# Altium PCB DAM10.PcbDoc
Units mm, origin at the board's own origin, x right, y up, seen from the top; angles counter-clockwise.
Board outline 153 x 82.02 mm, 4 copper layers (Top Layer, MidLayer1, MidLayer2, Bottom Layer), stack 0.778 mm thick; 96 components, 70 nets, 353 pads, 42 vias.
Unrouted connection lines stored in the file: 116.
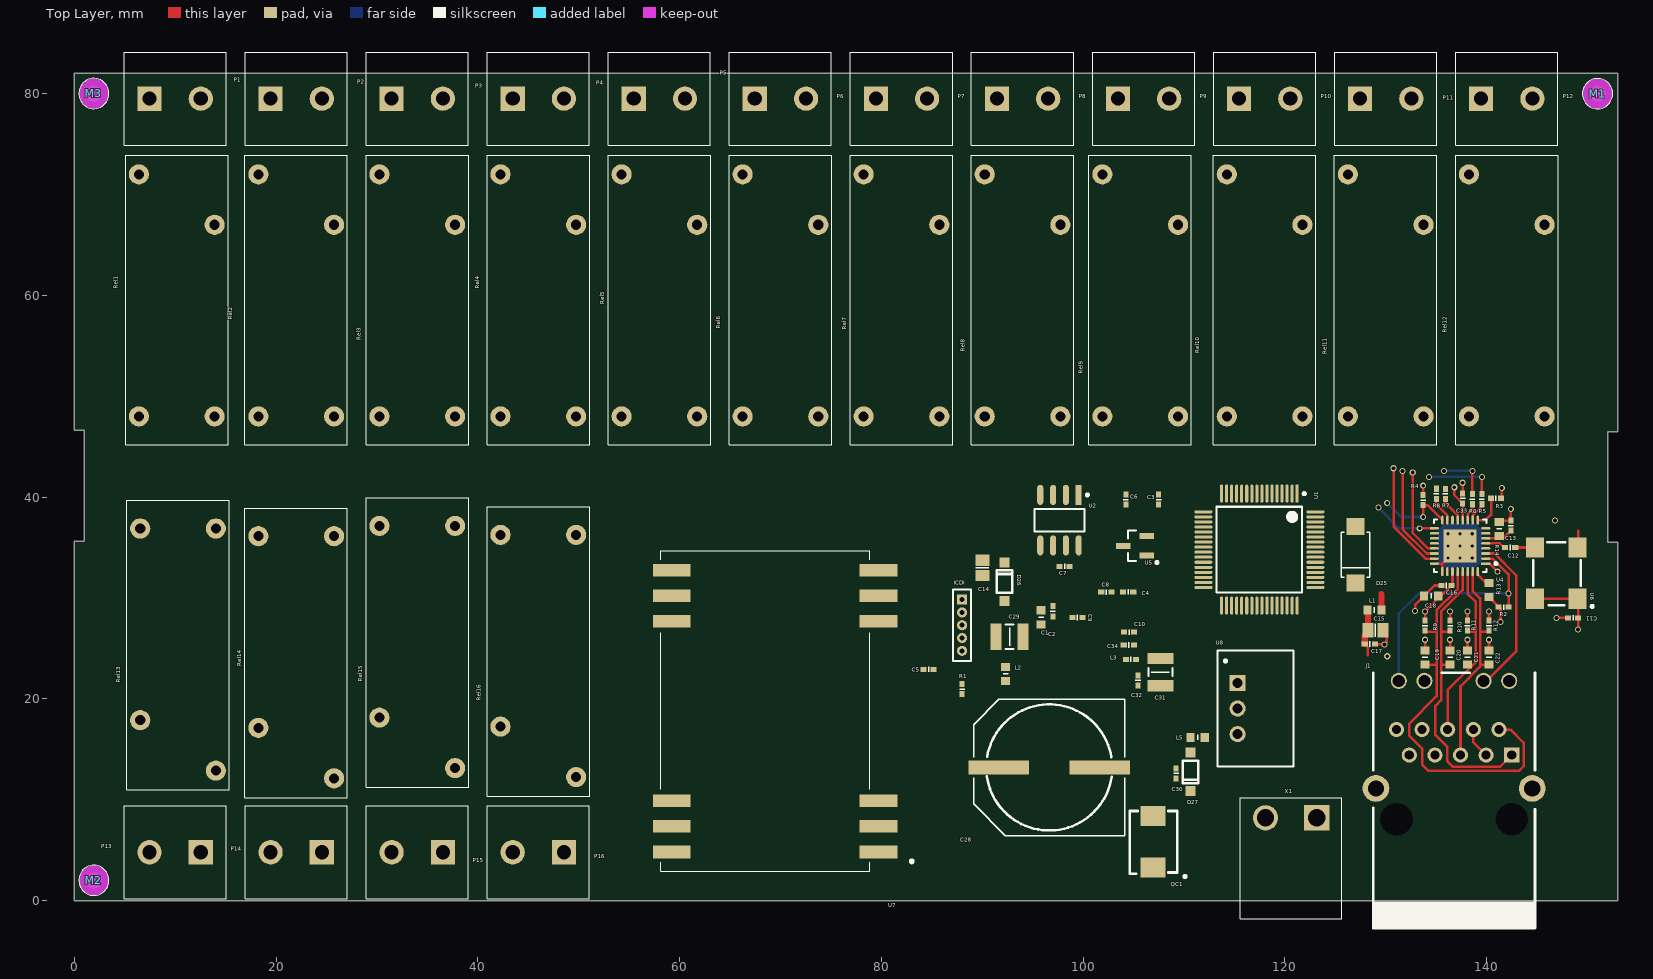
[diagram p0: Top Layer view]
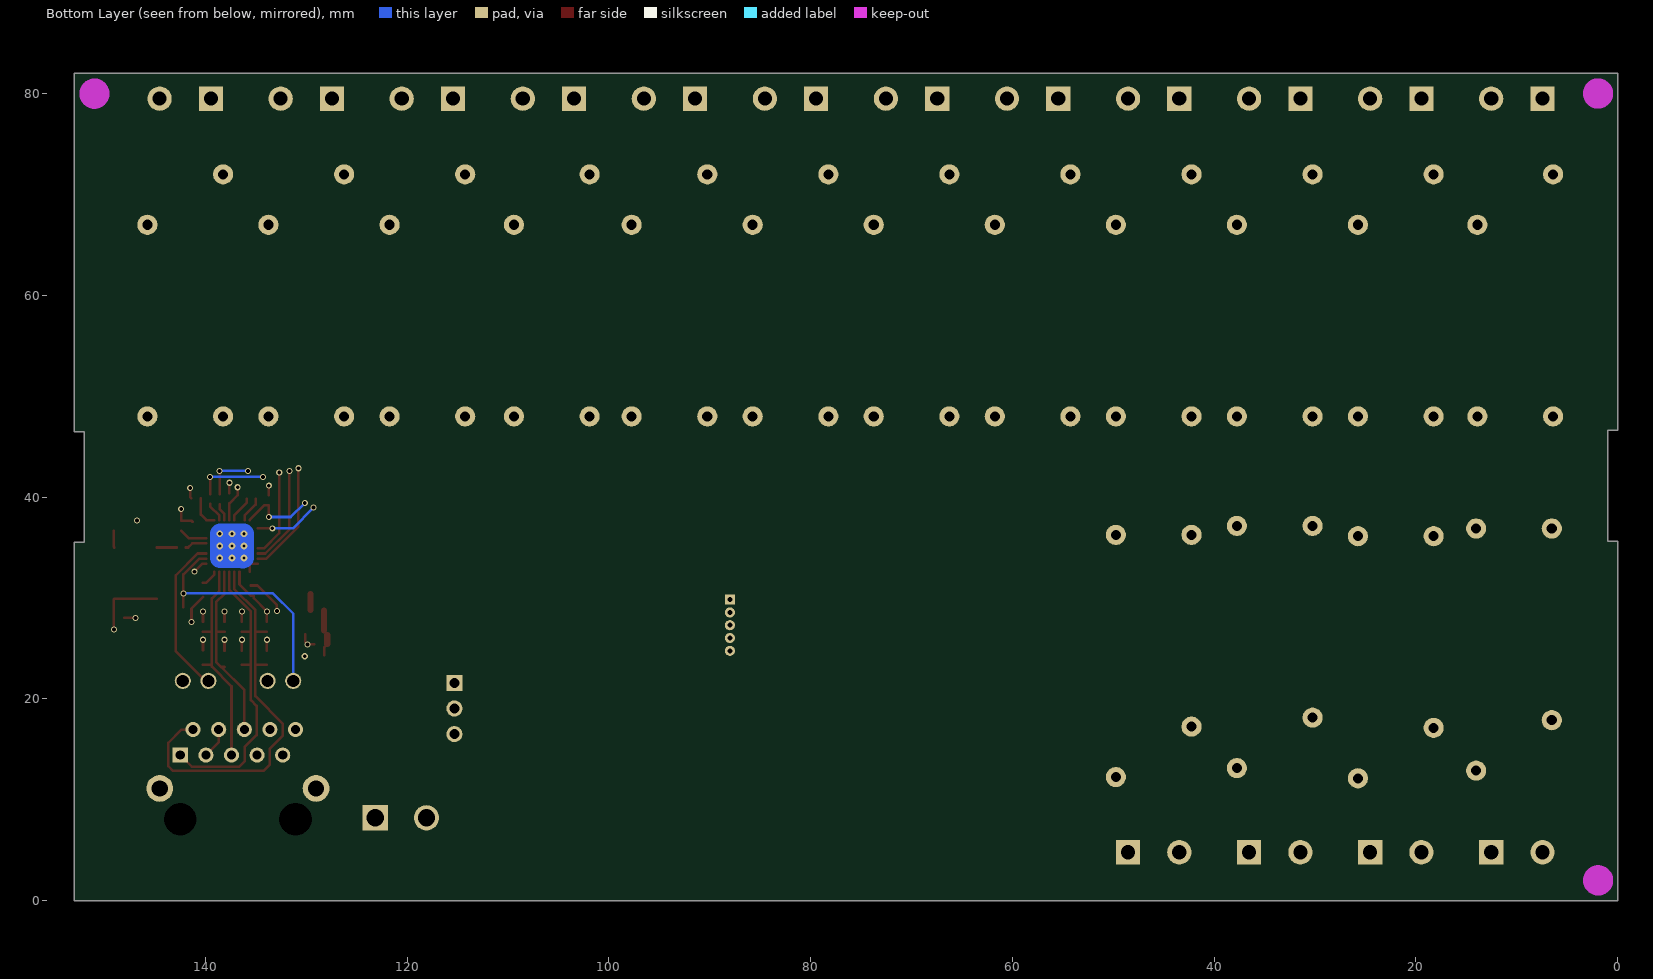
[diagram p1: Bottom Layer view, seen from below]

## Layer stack, top to bottom
Top Solder: solder mask 0.0102, Solder Resist, Dk 3.5
Top Layer: signal copper 0.0356
Dielectric 1: core 0.254, FR-4, Dk 4.2
MidLayer1: signal copper 0.036
Dielectric 3: prepreg 0.127, Dk 4.2
MidLayer2: signal copper 0.036
Dielectric 2: core 0.254, Dk 4.2
Bottom Layer: signal copper 0.0356
Bottom Solder: solder mask 0.0102, Solder Resist, Dk 3.5

## Board outline
0,0 0,35.65 1,35.65 1,46.648 0,46.648 0,82.017 153,82.017 153,46.507 152,46.507 152,35.509 153,35.509 153,0

## Design rules (kind name [scope] priority, off if disabled: settings)
Clearance [All] p1: gap=0.12
HoleSize [All] p1: absolutevalues=TRUE maxlimit=4 minlimit=0.025 maxpercent=80.000 minpercent=20.000
PolygonConnect [All] p1: connectstyle=Relief reliefconductorwidth=0.254 reliefentries=4 polygonreliefangle="90 Angle" airgapwidth=0.254
RoomDefinition DAM10_Relays [InComponentClass('DAM10_Relays')] p1: confinementstyle=ConfineIn formatcopy=TRUE lockcomponents=FALSE outline -10.16,-0.964 177.673,-0.964 177.673,84.328 -10.16,84.328
RoomDefinition DAM10_Ethernet [InComponentClass('DAM10_Ethernet')] p2: confinementstyle=ConfineIn formatcopy=TRUE lockcomponents=FALSE outline -6.985,-16.169 173.99,-16.169 173.99,87.122 -6.985,87.122
RoomDefinition DAM10_Control [InComponentClass('DAM10_Control')] p3: confinementstyle=ConfineIn formatcopy=TRUE lockcomponents=FALSE outline -4.572,-12.74 160.274,-12.74 160.274,91.821 -4.572,91.821
RoutingVias [All] p1: holewidth=0.711 width=1.27 viastyle="Through Hole" minholewidth=0.3 minwidth=0.5 maxholewidth=0.711 maxwidth=1.27
SilkToBoardRegionClearance [HasFootprint('7499210124A')] p1:
SolderMaskExpansion [All] p1: expansion=0.102
UnpouredPolygon [All] p1: allowunpoured=FALSE
Width [All] p1: maxlimit=4 minlimit=0.254 preferedwidth=0.254
27 further rules are at their usual default settings.

## Classes and differential pairs
component class DAM10_Relays: P1 P2 P3 P4 P5 P6 P7 P8 P9 P10 P11 P12 P13 P14 P15 P16 Rel1 Rel2 Rel3 Rel4 Rel5 Rel6 Rel7 Rel8 Rel9 Rel10 Rel11 Rel12 Rel13 Rel14 Rel15 Rel16
component class DAM10_Control: C1 C2 C3 C4 C5 C6 C7 C8 C9 C10 C28 C29 C30 C31 C32 C34 D25 D26 D27 ICDI L2 L3 L5 M1 M2 M3 QC1 R1 U1 U2 U5 U7 U8 X1
component class DAM10_Ethernet: C11 C12 C13 C14 C15 C16 C17 C18 C19 C20 C21 C22 C33 J1 L1 R2 R3 R4 R5 R6 R7 R8 R9 R10 R11 R12 R13 R14 U4 U6

## Components (designator, comment, footprint, x,y, rotation, side; value= is the part's Value field where it differs from the comment)
C1 "10uF10V_0603" C0603 95.838,28.089 r270 top
C2 "100nF16V_0402" C0402 96.998,28.689 r270 top
C3 "100nF16V_0402" C0402 107.488,39.751 r90 top
C4 "100nF16V_0402" C0402 104.475,30.607 r180 top
C5 "100nF16V_0402" C0402 84.683,22.931 r0 top
C6 "100nF16V_0402" C0402 104.249,39.751 r90 top
C7 "22pF50V_0402" C0402 98.171,33.147 r180 top
C8 "22pF50V_0402" C0402 102.305,30.577 r180 top
C9 "100nF16V_0402" C0402 99.441,28.067 r180 top
C10 "100nF16V_0402" C0402 104.555,26.616 r180 top
C11 "100nF16V_0402" C0402 148.567,28.027 r180 top
C12 "1uF50V_0603" C0603 141.26,36.854 r90 top
C13 "470pF50V_0402" C0402 142.4,37.184 r90 top
C14 "4u7F25V_0805" C0805 90.02,32.994 r270 top
C15 "4u7F25V_0805" C0805 128.982,26.803 r0 top
C16 "100nF25V_0402" C0402 136.02,31.244 r180 top
C17 "100nF25V_0402" C0402 128.422,25.447 r0 top
C18 "22nF50V_0603" C0603 134.51,30.214 r180 top
C19 "10pF50V_0603" C0603 133.89,24.114 r90 top
C20 "10pF50V_0603" C0603 136.383,24.114 r90 top
C21 "10pF50V_0603" C0603 138.11,24.114 r90 top
C22 "10pF50V_0603" C0603 140.24,24.114 r90 top
C28 "470uF25V_POL" Panasonic-H13 96.647,13.208 r180 top
C29 "10uF50V_1210" C1210 92.71,26.162 r0 top
C30 "100nF25V_0402" C0402 109.232,12.607 r90 top
C31 "10uF25V_1210" C1210 107.665,22.656 r90 top
C32 "100nF25V_0402" C0402 105.445,21.826 r270 top
C33 "100nF25V_0402" C0402 137.627,39.877 r90 top
C34 "100nF25V_0402" C0402 104.535,25.346 r0 top
D25 "SMAJ58A-E3/61" DO214A 127,34.29 r270 top
D26 "RB160M-30TR" SOD123 92.202,31.623 r90 top
D27 "SD103AW-V-GS08" SOD123 110.642,12.767 r270 top
ICDI "ICDI" HDR1X5-1.27 88.011,27.305 r270 top
J1 "7499210124A" 7499210124A 136.78,8.074 r180 top
L1 "120R4A_0603" L0603 128.88,28.809 r0 top
L2 "300R2A_0603" L0603 92.329,22.479 r90 top
L3 "120R1.2A_0402" P0402 104.745,23.916 r180 top
L5 "10uF2A" L0603 111.362,16.187 r180 top
M1 "Mark" Mark-3mm 151,80 r0 top
M2 "Mark" Mark-3mm 1.942,2.014 r0 top
M3 "Mark" Mark-3mm 1.942,80.014 r90 top
P1 "PHOENIX_1715721" Phoenix-2-5_08 10,79.5 r0 top
P2 "PHOENIX_1715721" Phoenix-2-5_08 22,79.5 r0 top
P3 "PHOENIX_1715721" Phoenix-2-5_08 34,79.5 r0 top
P4 "PHOENIX_1715721" Phoenix-2-5_08 46,79.5 r0 top
P5 "PHOENIX_1715721" Phoenix-2-5_08 58,79.5 r0 top
P6 "PHOENIX_1715721" Phoenix-2-5_08 70,79.5 r0 top
P7 "PHOENIX_1715721" Phoenix-2-5_08 82,79.5 r0 top
P8 "PHOENIX_1715721" Phoenix-2-5_08 94,79.5 r0 top
P9 "PHOENIX_1715721" Phoenix-2-5_08 106,79.5 r0 top
P10 "PHOENIX_1715721" Phoenix-2-5_08 118,79.5 r0 top
P11 "PHOENIX_1715721" Phoenix-2-5_08 130,79.5 r0 top
P12 "PHOENIX_1715721" Phoenix-2-5_08 142,79.5 r0 top
P13 "PHOENIX_1715721" Phoenix-2-5_08 10,4.8 r180 top
P14 "PHOENIX_1715721" Phoenix-2-5_08 22,4.8 r180 top
P15 "PHOENIX_1715721" Phoenix-2-5_08 34,4.8 r180 top
P16 "PHOENIX_1715721" Phoenix-2-5_08 46,4.8 r180 top
QC1 "7A-8.000MAAJ-T" TXC_7A 106.934,5.842 r90 top
R1 "10k_0402" R0402 88.013,20.971 r270 top
R2 "10k_0402" R0402 141.69,29.104 r0 top
R3 "10k_0402" R0402 140.917,39.89 r0 top
R4 "1k5_0402" R0402 133.716,39.714 r90 top
R5 "10R_0402" R0402 139.532,39.796 r270 top
R6 "10R_0402" R0402 138.593,39.796 r90 top
R7 "10R_0402" R0402 135.91,40.314 r90 top
R8 "10R_0402" R0402 135.02,40.334 r90 top
R9 "49R9_0402" R0402 133.89,27.274 r90 top
R10 "49R9_0402" R0402 136.383,27.274 r90 top
R11 "49R9_0402" R0402 138.11,27.274 r90 top
R12 "49R9_0402" R0402 140.24,27.274 r90 top
R13 "12k1_0603" R0603(1608) 140.24,30.794 r90 top
R14 "33R_0402" R0402 142.344,35.012 r180 top
Rel1 "Finder-43_41-Rel" "Finder-43_41 series" 10.16,60 r90 top
Rel2 "Finder-43_41-Rel" "Finder-43_41 series" 22,60 r90 top
Rel3 "Finder-43_41-Rel" "Finder-43_41 series" 34,60 r90 top
Rel4 "Finder-43_41-Rel" "Finder-43_41 series" 46,60 r90 top
Rel5 "Finder-43_41-Rel" "Finder-43_41 series" 58,60 r90 top
Rel6 "Finder-43_41-Rel" "Finder-43_41 series" 70,60 r90 top
Rel7 "Finder-43_41-Rel" "Finder-43_41 series" 82,60 r90 top
Rel8 "Finder-43_41-Rel" "Finder-43_41 series" 94,60 r90 top
Rel9 "Finder-43_41-Rel" "Finder-43_41 series" 105.664,60 r90 top
Rel10 "Finder-43_41-Rel" "Finder-43_41 series" 118,60 r90 top
Rel11 "Finder-43_41-Rel" "Finder-43_41 series" 130,60 r90 top
Rel12 "Finder-43_41-Rel" "Finder-43_41 series" 142,60 r90 top
Rel13 "Finder-43_41-Rel" "Finder-43_41 series" 10.287,24.892 r270 top
Rel14 "Finder-43_41-Rel" "Finder-43_41 series" 22,24.13 r270 top
Rel15 "Finder-43_41-Rel" "Finder-43_41 series" 34,25.146 r270 top
Rel16 "Finder-43_41-Rel" "Finder-43_41 series" 46,24.257 r270 top
U1 "PIC32MX695F512H-80I/PT" TQFP-64_N1 117.475,34.798 r270 top
U2 "25LC1024-I_SM" SOP8_N 97.663,37.719 r270 top
U4 "LAN8741-EN" 32M1-A_M 137.371,35.164 r180 top
U5 "11AA02E48T-I_TT" SOT23_M 105.156,35.179 r180 top
U6 "TXC-7W-50.000MBB-T" TXC_7W 146.916,32.472 r90 top
U7 "AG-9700-2BR" Ag9700-2BR 69.469,18.796 r90 top
U8 "R-783.3-0.5" R-783_3-0_5 115.316,19.05 r270 top
X1 "WR-TBL3127" WR-TBL-3127 120.627,8.215 r180 top

## Footprints (in the part's own frame and the unit in brackets; to place one, negate y for a bottom-side part, rotate by r counter-clockwise, add the part's x,y. Pads: shape width x height; smd on the part's side, far side on the other; paste and mask are expansions set on the pad)
32M1-A_M [mm] "QFN, 32-Leads, Body 5x5mm, Pitch 0.5mm, IPC Low Density"
  rect 0.9x0.25 smd: 1(-2.55,1.75)
  oval 0.9x0.25 smd: 2(-2.55,1.25) 3(-2.55,0.75) 4(-2.55,0.25) 5(-2.55,-0.25) 6(-2.55,-0.75) 7(-2.55,-1.25) 8(-2.55,-1.75) 17(2.55,-1.75) 18(2.55,-1.25) 19(2.55,-0.75) 20(2.55,-0.25) 21(2.55,0.25) 22(2.55,0.75) 23(2.55,1.25) 24(2.55,1.75)
  oval 0.25x0.9 smd: 9(-1.75,-2.55) 10(-1.25,-2.55) 11(-0.75,-2.55) 12(-0.25,-2.55) 13(0.25,-2.55) 14(0.75,-2.55) 15(1.25,-2.55) 16(1.75,-2.55) 25(1.75,2.55) 26(1.25,2.55) 27(0.75,2.55) 28(0.25,2.55) 29(-0.25,2.55) 30(-0.75,2.55) 31(-1.25,2.55) 32(-1.75,2.55)
  rect 3.3x3.3 smd: 33(0,0)
  silkscreen extent -3.68,-2.6 2.6,2.6, body extent -2.58,-2.58 2.58,2.58, height 1
7499210124A [mm] "Connector; PCB Jack, Thru-Hole; RJ45,POE; Shielded with Lightpipes; Right Angle"
  rect 1.5x1.5 hole 0.9: 1(-5.715,-6.35)
  round 1.5 hole 0.9: 2(-4.445,-8.89) 3(-3.175,-6.35) 4(-1.905,-8.89) 5(-0.635,-6.35) 6(0.635,-8.89) 7(1.905,-6.35) 8(3.175,-8.89) 9(4.445,-6.35) 10(5.715,-8.89)
  round 1.6 hole 1.2: 11(-5.465,-13.72) 12(-2.925,-13.72) 13(2.946,-13.72) 14(5.486,-13.72)
  round 2.65 hole 1.6: MH1(-7.745,-3.05) MH2(7.745,-3.05)
  round 2.95 hole 3.25 unplated: MH3(-5.715,0) MH4(5.715,0)
  silkscreen extent -8.02,-14.5 8.02,10.8, body extent -8.27,-14.51 8.13,10.79, height 13.81
Ag9700-2BR [mm] "Silvertel, Ag9700-Small"
  rect 1.25x3.75 smd: 1(-13.97,-10.25) 2(-11.43,-10.25) 3(-8.89,-10.25) 4(8.89,-10.25) 5(11.43,-10.25) 6(13.97,-10.25) 7(13.97,10.25) 8(11.43,10.25) 9(8.89,10.25) 10(-8.89,10.25) 11(-11.43,10.25) 12(-13.97,10.25)
  silkscreen extent -15.9,-13.69 15.9,11.35, body extent -15.9,-9.4 15.9,11.35, height 18
C0402 [mm] "Chip Capacitor, Body 1.0x0.5mm, IPC High Density"
  rect 0.6x0.5 smd: 1(-0.5,0) 2(0.5,0)
  silkscreen extent 0,-0.25 0,0.25, body extent -0.5,-0.25 0.5,0.25, height 0.5
C0603 [mm] "Chip Capacitor, 0603"
  rect 0.8x0.9 smd: 1(-0.7,0) 2(0.7,0)
  silkscreen extent 0,-0.25 0,0.25, body extent -0.8,-0.4 0.8,0.4, height 0.8
C0805 [mm] "Chip Capacitor, Body 2.0x1.3mm, IPC High Density"
  rect 1.1x1.4 smd: 1(-0.75,0) 2(0.75,0)
  silkscreen extent 0,-0.64 0,0.64, body extent -0.5,-0.25 0.5,0.25, height 0.5
C1210 [mm] "Chip Capacitor, Body 3.2x2.5mm, IPC High Density"
  rect 1.1x2.6 smd: 1(-1.35,0) 2(1.35,0)
  silkscreen extent -0.4,-1.2 0.4,1.2, body extent -1.6,-1.25 1.6,1.25, height 1.35
DO214A [mm] "Diode; 2 Leads"
  rect 1.7x1.8 smd: 1(2.8,0) 2(-2.8,0)
  silkscreen extent -2.25,-1.4 2.25,1.4, body extent -2.25,-1.4 2.25,1.4, height 2.3
"Finder-43_41 series" [mm] "Finder 43 series relay"
  round 2 hole 1: 1(-12,-3.75) 2(-12,3.75) 3(7,-3.75) 4(12,3.75)
  silkscreen extent -14.79,-5.08 13.91,5.08, body extent -14.73,-5 13.67,5, height 14.43
HDR1X5-1.27 [mm] "Connector; Header; 5 Position"
  rect 1x1 hole 0.5: 1(-2.54,0)
  round 1 hole 0.5: 2(-1.27,0) 3(0,0) 4(1.27,0) 5(2.54,0)
  silkscreen extent -3.55,-0.9 3.55,0.9, body extent -3.56,-0.89 3.56,0.89, height 7
L0603 [mm] "Chip Ferrit, 0603"
  rect 0.8x0.9 smd: 1(-0.7,0) 2(0.7,0)
  silkscreen extent 0,-0.25 0,0.25, body extent -0.8,-0.4 0.8,0.4, height 0.8
Mark-3mm [mm]
  round 1.6 smd paste-2: 0(0,0)
  Keep-Out Layer circle w2: c0,0 r0.5
  silkscreen extent -1.5,-1.5 1.5,1.5
P0402 [mm] "Chip, Body 1.0x0.5mm"
  rect 0.6x0.5 smd: 1(-0.5,0) 2(0.5,0)
  silkscreen extent 0,-0.25 0,0.25, body extent -0.55,-0.3 0.55,0.3, height 0.55
Panasonic-H13 [mm] "SMD electrolytic, Panasonic"
  rect 6x1.4 smd: 1(5,0) 2(-5,0)
  silkscreen extent -7.5,-6.75 7.5,6.75, body extent -7.5,-6.75 7.5,6.75, height 13
Phoenix-2-5_08 [mm] "Phoenix, 1715721"
  rect 2.4x2.4 hole 1.4: 1(-2.54,0)
  round 2.4 hole 1.4: 2(2.54,0)
  silkscreen extent -5.06,-4.6 5.06,4.6, body extent -5.05,-5.19 5.85,4.61, height 14.2
R0402 [mm] "Chip Resistor, Body 1.0x0.5mm"
  rect 0.6x0.5 smd: 1(-0.5,0) 2(0.5,0)
  silkscreen extent 0,-0.25 0,0.25, body extent -0.5,-0.24 0.5,0.26, height 0.4
R0603(1608) [mm] "Chip Resistor, 0603"
  rect 0.8x0.9 smd: 1(-0.7,0) 2(0.7,0)
  body extent -0.8,-0.4 0.8,0.4, height 0.5
R-783_3-0_5 [mm] "Recon DC-DC"
  rect 1.6x1.6 hole 1: 1(-2.54,0)
  round 1.6 hole 1: 2(0,0) 3(2.54,0)
  silkscreen extent -5.75,-2 5.75,5.55, body extent -5.72,-2.03 5.72,5.59, height 10.2
SOD123 [mm]
  rect 1x1 smd: 1(1.905,0) 2(-1.905,0)
  silkscreen extent -1.1,-0.76 1.14,0.76, body extent -1.4,-0.85 1.4,0.88, height 1.4
SOP8_N [mm] "SOIC, 8-Leads, Body 4.9x3.9mm, Pitch 1.27mm, IPC Medium Density"
  rect 2x0.6 smd: 1(-2.5,1.905)
  oval 2x0.6 smd: 2(-2.5,0.635) 3(-2.5,-0.635) 4(-2.5,-1.905) 5(2.5,-1.905) 6(2.5,-0.635) 7(2.5,0.635) 8(2.5,1.905)
  silkscreen extent -2.62,-2.5 1.1,2.88, body extent -3,-2.54 3,2.54, height 1.7
SOT23_M [mm] "SOT23, 3-Leads, Body 2.9x1.3mm, Pitch 0.95mm, Lead Span 2.3mm - Reverse Pinning, IPC Low Density"
  rect 1.45x0.6 smd: 1(1.175,0) 2(-1.175,-0.95) 3(-1.175,0.95)
  silkscreen extent -2.28,-1.5 0.7,1.78, body extent -1.15,-1.5 1.15,1.5, height 1.1
TQFP-64_N1 [mm] "64-Pin Thin Plastic Quad Flat Pack 0.5 mm Pitch, 1.0/0.1 mm Lead Form, IPC Medium Density"
  rect 1.8x0.3 smd: 1(-5.55,3.75)
  oval 1.8x0.3 smd: 2(-5.55,3.25) 3(-5.55,2.75) 4(-5.55,2.25) 5(-5.55,1.75) 6(-5.55,1.25) 7(-5.55,0.75) 8(-5.55,0.25) 9(-5.55,-0.25) 10(-5.55,-0.75) 11(-5.55,-1.25) 12(-5.55,-1.75) 13(-5.55,-2.25) 14(-5.55,-2.75) 15(-5.55,-3.25) 16(-5.55,-3.75) 33(5.55,-3.75) 34(5.55,-3.25) 35(5.55,-2.75) 36(5.55,-2.25) 37(5.55,-1.75) 38(5.55,-1.25) 39(5.55,-0.75) 40(5.55,-0.25) 41(5.55,0.25) 42(5.55,0.75) 43(5.55,1.25) 44(5.55,1.75) 45(5.55,2.25) 46(5.55,2.75) 47(5.55,3.25) 48(5.55,3.75)
  oval 0.3x1.8 smd: 17(-3.75,-5.55) 18(-3.25,-5.55) 19(-2.75,-5.55) 20(-2.25,-5.55) 21(-1.75,-5.55) 22(-1.25,-5.55) 23(-0.75,-5.55) 24(-0.25,-5.55) 25(0.25,-5.55) 26(0.75,-5.55) 27(1.25,-5.55) 28(1.75,-5.55) 29(2.25,-5.55) 30(2.75,-5.55) 31(3.25,-5.55) 32(3.75,-5.55) 49(3.75,5.55) 50(3.25,5.55) 51(2.75,5.55) 52(2.25,5.55) 53(1.75,5.55) 54(1.25,5.55) 55(0.75,5.55) 56(0.25,5.55) 57(-0.25,5.55) 58(-0.75,5.55) 59(-1.25,5.55) 60(-1.75,5.55) 61(-2.25,5.55) 62(-2.75,5.55) 63(-3.25,5.55) 64(-3.75,5.55)
  silkscreen extent -5.67,-4.25 4.25,4.58, body extent -5,-5 5,5, height 1.2
TXC_7A [mm]
  rect 2x2.5 smd: 1(-2.54,0) 2(2.54,0)
  silkscreen extent -3.57,-3.3 3.05,2.29, body extent -3.17,-2.41 3.05,2.25, height 1.3
TXC_7W [mm]
  rect 2x1.8 smd: 1(-2.54,-2.1) 2(2.54,-2.1) 3(2.54,2.1) 4(-2.54,2.1)
  silkscreen extent -3.43,-3.68 3.05,2.29, body extent -3.18,-2.41 3.05,2.25, height 1.3
WR-TBL-3127 [mm] "Header horizontal, 2 pins"
  rect 2.5x2.5 hole 1.7: 1(-2.54,0)
  round 2.5 hole 1.7: 2(2.54,0)
  silkscreen extent -5.04,-2 5.04,10, body extent -4.99,-1.91 5.01,10.09, height 8.75

## Part data
C1 C2 C3 C4 C5 C6 C9 C10 C11 C31: "Capacitor"
C7 C8: "Murata, GRM series, 50V"
C12: "C series, X5R, 10%"
C13: "AVX, 50V"
C14 C15: "TDK  C series, X7R, 10%, 25V"
C16 C17 C30 C32 C33 C34: "AVX, X5R, 10%, 25V"
C18: "AVX ,  X7R, 5%, 50V"
C19 C20 C21 C22: "AVX ,  +-0.5pF, 50V"
C28: "Panasonic, TG series"
C29: "AVX,  X7R, 10%, 50V"
D25: "TVS, 400W, 58V"
D26 D27: "Diode Schottky,2A,40V"
ICDI: "Header, 5-Pin"
J1: library part "Ethernet, POE, WE7499210124A", "Modular Jack , Right Angle RJ-45, Low Profile"
L1: "Murata, Ferrit, 120Rx2A"
L2: "WE, Ferrit, 300Rx2A"
L3: "Ferrit, 1.2A, 120R@100MHz"
L5: library part 300R2A_0603, "WE, Ferrit, 300Rx2A"
P1 P2 P3 P4 P5 P6 P7 P8 P9 P10 P11 P12 P13 P14 P15 P16: library part 2Pol_1715721, "Phoenix, 2 pol, 5.08mm, 22A, 715721"
QC1: library part Crystal_8MHz, "Crystal, 7A-8.000MAAJ-T"
R1 R2 R3 R4 R5 R6 R7 R8: "Vishay CRCW series, 125mW, 1%"
R9 R10 R11 R12 R14: "Vishay CRCW series, 63mW, 1%"
R13: "Vishay, CRCW series, 100mW, 1%"
Rel1 Rel2 Rel3 Rel4 Rel5 Rel6 Rel7 Rel8 Rel9 Rel10 Rel11 Rel12 Rel13 Rel14 Rel15 Rel16: "Finder-43-Relay, 16A, 12V, 400mW"
U1: "High Performance ROM-less Microcontroller with External Memory Bus, 1.5K RAM, 64-Pin TQFP, 4.2 to 5.5V Supply Range, Industrial Temperature"
U2: "1024 Kbit Serial SPI Bus EEPROM"
U4: "Ethernet Phy"
U5: "2 kbit Serial  EEPROM"
U6: "Crystal"
U7: "PoE, 12V, 12W"
U8: library part Recom-R-783_3-0_5, "Voltage Regulator"
X1: library part Header-2-WR-TBL3127, "Header 2 pin, horizontal,WR-TBL3127"

## Via types
v1: diameter 0.6, hole 0.381, Top Layer to Bottom Layer, 33 vias
v2: diameter 0.66, hole 0.33, Top Layer to Bottom Layer, tented top, 9 vias

## Nets (pads, with @x,y where several pads share a name; then routed paths per layer and width w, separated by ;. In a path a pad name is that pad's centre, name@x,y a point inside that pad or via, vN(x,y) a via of type N, cw(c..) or ccw(c..) an arc to the next point about the centre after c; other vN are vias at no path point)
3V3: C2.1 C3.1 C4.1 C5.1 C6.1 C9.1 C10.2 C11.1 C14.1 C33.1 C34.1 ICDI.5 L1.2 L3.2 R1.2 R3.2 R4.2 U1.10 U1.19 U1.26 U1.38 U1.57 U2.3 U2.7 U2.8 U4.12 U5.2 U6.1 U6.4 | length 14.3
  Top Layer w0.254: R4.2 133.716,41.02 v1@133.83,41.134 ; v1(136.802,40.984) 136.802,40.189 C33.1@137.621,39.37 ; U4.12 C33.1@137.621,39.37 ; C33.1 C33.1@137.621,39.37 ; R3.2@141.42,39.904 141.51,39.994 v1@141.51,40.707 ; U6.4 146.789,29.932 ; 146.797,29.94 146.789,29.932 ; v1(149.075,26.884) 149.075,29.873 U6.1 146.789,29.932
  Top Layer w0.6: L1.2 129.58,30.384
  other v1: 146.789,37.679 141.51,40.894 133.716,41.134
12V: C30.1 D26.1 D27.1 U8.1
GND: C1.2 C2.2 C3.2 C4.2 C5.2 C6.2 C7.2 C8.2 C9.2 C10.1 C11.2 C12.2 C13.2 C14.2 C15.2 C16.2 C17.2 C18.2 C19.2 C20.2 C21.2 C22.2 C28.2 C29.2 C30.2 C31.2 C32.2 C33.2 C34.2 ICDI.2 J1.11 J1.13 J1.MH1 J1.MH2 R2.1 R13.1 U1.9 U1.20 U1.25 U1.41 U2.4 U4.24 U4.25 U4.33 U5.1 U6.2 U7.7 U8.2 X1.2 | length 32.6
  Top Layer w0.254: C17.2@129.203,25.419 v1@129.894,25.419 ; 130.112,25.637 C15.2@130.112,26.423 ; v1(132.92,28.704) 132.92,29.324 C18.2 134.84,31.244 C16.2 ; C19.2@133.906,24.767 v1(133.906,25.864) ; U4.24 135.621,33.415 ; U4.25 135.621,33.415 ; C20.2@136.383,24.767 C20.2 v1(136.383,25.864) ; v2(137.371,35.164) v2(136.171,33.964) 135.621,33.415 ; C33.2 v1(137.627,41.426) ; C21.2@138.11,24.764 C21.2 v1(138.11,25.864) ; C22.2@140.24,24.804 C22.2 v1(140.24,25.864) ; C12.2 141.385,37.68 C13.2@142.4,37.68 ; C13.2 v1(142.4,38.824) ; v1(146.916,28.027) C11.2 ; U6.2 149.075,35.071 149.075,36.663
  Top Layer w0.3: R13.1 141.37,28.964 v1(141.37,27.634)
  Bottom Layer w2: v2(136.171,33.964) v2(136.171,35.164) v2(136.171,36.364) v2(137.371,36.364) v2(138.571,36.364) v2(138.571,35.164) v2(138.571,33.964) v2(137.371,33.964) 136.294,33.964 v2@136.294,33.921
  other v1: 129.882,25.407
NetC1_1: C1.1 U1.56
NetC7_1: C7.1 QC1.1 U1.40
NetC8_1: C8.1 QC1.2 U1.39
NetC12_1: C12.1 C13.1 U4.6 | length 2.8
  Top Layer w0.254: U4.6 141.63,35.915 C13.1
NetC15_1: C15.1 C16.1 C17.1 C18.1 J1.3 J1.4 L1.1 R9.2 R10.2 R11.2 R12.2 U4.1 U4.27 | length 17.7
  Top Layer w0.254: C17.1@127.932,25.437 128.18,25.159 ; 128.203,24.339 128.203,25.136 ; R9.2@133.906,27.644 v1(133.906,28.68) 135.21,29.984 C18.1 135.49,30.214 C16.1 136.621,31.345 U4.27 ; R10.2@136.383,27.644 v1@136.383,28.614 ; R11.2@138.11,27.644 v1@138.11,28.614 ; J1.4 138.685,15.694 J1.3 ; U4.1 140.28,33.415 v1(141.082,32.613) ; R12.2@140.24,27.644 v1@140.24,28.614
  Top Layer w0.6: C17.1 C15.1@127.922,26.327 ; C15.1 L1.1@128.232,28.758
  other v1: 130.152,24.231 136.383,28.68 138.11,28.68 140.24,28.68
NetC19_1: C19.1 J1.2 R9.1 U4.28 | length 39.8
  Top Layer w0.254: C19.1@133.906,23.367 135.049,23.367 ; R9.1@133.906,26.644 135.052,26.644 ; U4.28 137.121,30.866 135.052,28.797 135.052,26.644 ; J1.2 142.37,16.964 143.68,15.654 143.68,13.324 143.22,12.864 134.24,12.864 133.62,13.484 133.62,15.064 132.32,16.364 132.32,17.535 135.052,20.267 135.052,26.644
NetC20_1: C20.1 J1.1 R10.1 U4.29 | length 29.3
  Top Layer w0.254: C20.1@136.383,23.367 135.5,23.367 ; R10.1@136.383,26.644 135.5,26.644 ; U4.29 137.621,30.795 135.5,28.674 135.5,26.644 ; J1.1 141.355,13.284 136.64,13.284 136.11,13.814 136.11,15.214 134.92,16.404 134.92,19.304 135.5,19.884 135.5,23.367 ; 135.5,23.367 135.5,26.644
NetC21_1: C21.1 J1.6 R11.1 U4.30 | length 18.2
  Top Layer w0.254: J1.6 136.145,20.879 138.43,23.164 C21.1@138.11,23.164 ; R11.1@138.11,26.644 138.89,26.644 ; U4.30 138.121,30.417 138.94,29.598 138.94,23.664 C21.1@138.44,23.164
NetC22_1: C22.1 J1.5 R12.1 U4.31 | length 21
  Top Layer w0.254: J1.5 137.415,21.249 139.36,23.194 139.36,29.953 138.621,30.692 U4.31 ; 139.36,23.404 C22.1@140.24,23.404 ; 139.38,26.644 R12.1@140.24,26.644
NetC28_1: C28.1 L2.1 U7.8
NetC29_1: C29.1 D26.2 L2.2
NetC31_1: C31.1 C32.1 L3.1 U8.3
NetD25_1: D25.1 J1.9 U7.1
NetD25_2: D25.2 J1.10 U7.2
NetD27_2: D27.2 L5.2
NetICDI_1: ICDI.1 U1.16
NetICDI_3: ICDI.3 U1.15
NetICDI_4: ICDI.4 R1.1 U1.7
NetJ1_12: J1.12 U4.3 | length 15.9
  Top Layer w0.254: J1.12 140.01,21.794 142.93,24.714 142.93,32.257 140.773,34.414 U4.3
NetJ1_14: J1.14 R2.2 U4.2 | length 24.5
  Top Layer w0.254: U4.2 140.596,33.914 142.18,32.33 v1(142.18,30.464) 142.19,30.454 R2.2
  Bottom Layer w0.254: J1.14 131.294,28.448 133.31,30.464 v1(142.18,30.464)
NetL5_1: L5.1 X1.1
NetP1_1: P1.1 Rel1.4
NetP1_2: P1.2 Rel1.3
NetR3_1: R3.1 U4.9 | length 3.2
  Top Layer w0.254: U4.9 139.897,37.714 140.447,38.264 R3.1@140.447,39.89
NetR4_1: R4.1 U1.49 U4.16 | length 7.8
  Top Layer w0.254: v1@133.716,38.034 R4.1@133.716,39.211 ; R4.1 R4.1@133.716,39.211 ; U4.16 134.124,39.211 R4.1@133.716,39.211
  Bottom Layer w0.254: v1(130.15,39.428) 131.543,38.034 v1@133.716,38.034
  other v1: 133.716,38.034
NetR5_1: R5.1 U1.60 | length 6.9
  Top Layer w0.254: R5.1 v1(139.532,41.996)
  Bottom Layer w0.254: v1@134.285,42.016 v1@139.532,42.016
  other v1: 134.28,41.984
NetR5_2: R5.2 U4.10 | length 2
  Top Layer w0.254: U4.10 138.621,38.165 139.532,39.077 R5.2 R5.2@139.532,39.339
NetR6_1: R6.1 U4.11 | length 1.8
  Top Layer w0.254: U4.11 138.121,38.351 138.593,38.823 R6.1
NetR6_2: R6.2 U1.61 | length 5.1
  Top Layer w0.254: v1(135.78,42.596) v1@135.802,42.596 ; R6.2 v1(138.593,42.596)
  Bottom Layer w0.254: v1(135.78,42.596) v1@138.589,42.596
NetR7_1: R7.1 U4.13 | length 2.6
  Top Layer w0.254: R7.1 135.91,39.435 137.121,38.225 U4.13
NetR7_2: R7.2 U1.64
NetR8_1: R8.1 U4.15 | length 2.6
  Top Layer w0.254: R8.1 135.02,39.271 136.121,38.171 U4.15
NetR8_2: R8.2 U1.62
NetR13_2: R13.2 U4.32 | length 1.8
  Top Layer w0.254: U4.32 139.121,32.313 139.94,31.494 R13.2
NetR14_1: R14.1 U6.3 | length 2
  Top Layer w0.254: R14.1 U6.3
NetR14_2: R14.2 U4.5 | length 2.2
  Top Layer w0.254: U4.5 141.307,35.414 141.709,35.012 R14.2@141.963,35.012
NetU1_1: U1.1 U4.21 | length 9
  Top Layer w0.254: v1@132.78,42.454 v1(132.68,42.454) 132.68,36.434 134.2,34.914 U4.21
  Bottom Layer w0.254: v1(132.68,42.454) v1@132.78,42.454
NetU1_2: U1.2 U4.22 | length 9.9
  Top Layer w0.254: v1(131.68,42.607) 131.68,36.804 134.07,34.414 U4.22
NetU1_3: U1.3 U4.23 | length 11.1
  Top Layer w0.254: v1(130.79,42.864) 130.79,37.084 133.96,33.914 U4.23
NetU1_4: U1.4
NetU1_5: U1.5
NetU1_6: U1.6
NetU1_11: U1.11
NetU1_12: U1.12
NetU1_13: U1.13
NetU1_17: U1.17
NetU1_18: U1.18 U2.1
NetU1_21: U1.21
NetU1_22: U1.22
NetU1_23: U1.23
NetU1_24: U1.24
NetU1_27: U1.27
NetU1_29: U1.29 U2.6
NetU1_30: U1.30 U4.17 | length 6.4
  Top Layer w0.254: v1(133.37,36.914) U4.17
  Bottom Layer w0.254: v1(129.27,38.984) 131.34,36.914 v1(133.37,36.914)
NetU1_31: U1.31 U2.2
NetU1_32: U1.32 U2.5
NetU1_33: U1.33 U5.3
NetU1_42: U1.42
NetU1_43: U1.43
NetU1_45: U1.45
NetU1_46: U1.46
NetU1_50: U1.50
NetU1_51: U1.51
NetU1_52: U1.52
NetU1_53: U1.53
NetU1_54: U1.54
NetU1_55: U1.55
pads on no net: J1.7 J1.8 J1.MH3 J1.MH4 M1.0 M2.0 M3.0 P2.1 P2.2 P3.1 P3.2 P4.1 P4.2 P5.1 P5.2 P6.1 P6.2 P7.1 P7.2 P8.1 P8.2 P9.1 P9.2 P10.1 P10.2 P11.1 P11.2 P12.1 P12.2 P13.1 P13.2 P14.1 P14.2 P15.1 P15.2 P16.1 P16.2 Rel1.1 Rel1.2 Rel2.1 Rel2.2 Rel2.3 Rel2.4 Rel3.1 Rel3.2 Rel3.3 Rel3.4 Rel4.1 Rel4.2 Rel4.3 Rel4.4 Rel5.1 Rel5.2 Rel5.3 Rel5.4 Rel6.1 Rel6.2 Rel6.3 Rel6.4 Rel7.1 Rel7.2 Rel7.3 Rel7.4 Rel8.1 Rel8.2 Rel8.3 Rel8.4 Rel9.1 Rel9.2 Rel9.3 Rel9.4 Rel10.1 Rel10.2 Rel10.3 Rel10.4 Rel11.1 Rel11.2 Rel11.3 Rel11.4 Rel12.1 Rel12.2 Rel12.3 Rel12.4 Rel13.1 Rel13.2 Rel13.3 Rel13.4 Rel14.1 Rel14.2 Rel14.3 Rel14.4 Rel15.1 Rel15.2 Rel15.3 Rel15.4 Rel16.1 Rel16.2 Rel16.3 Rel16.4 U1.8 U1.14 U1.28 U1.34 U1.35 U1.36 U1.37 U1.44 U1.47 U1.48 U1.58 U1.59 U1.63 U4.4 U4.7 U4.8 U4.14 U4.18 U4.19 U4.20 U4.26 U7.3 U7.4 U7.5 U7.6 U7.9 U7.10 U7.11 U7.12

## Polygon pours and split planes (outlines as drawn)
no net on MidLayer1 "3V3-1" (solid, shelved, pour order 5): 145.43,12.044 145.43,29.449 145.416,29.449 141.473,33.834 133.727,33.834 129.08,31.093 129.08,12.044

## Other copper
Top Layer:
  text "MN7" at 187.028,81.462 h2.2
  text "DAM 10" at 186.952,79.405 h1.27
  text "PN10013" at 186.863,77.55 h1.3

## Silkscreen, mask and mechanical layers (free items; w line width, h text height)
Top Solder:
  text "MN7" at 187.048,81.509 h2.2
  text "DAM 10" at 186.962,79.465 h1.27
  text "PN10013" at 186.873,77.61 h1.3
Mechanical 18:
  lines w0.05: 144.285,34.08 144.298,34.08 ; 145.285,29.59 141.729,33.654 134.744,33.654 130.553,31.114 130.553,13.461 145.298,13.461 145.298,19.43 145.298,29.59 ; 145.301,33.826 145.314,33.826 ; 120.67,13.435 120.67,81.544 151.361,81.544 151.361,13.434 145.873,13.434 145.872,29.539 141.885,34.06 134.735,34.06 134.735,34.098 130.099,31.241 130.099,13.435 120.67,13.435
Mechanical 19:
  lines w0.05: 120.61,0.164 151.488,0.164 151.488,81.714 120.61,81.714 120.61,0.164
Outline:
  the board outline again, w0.05

## Dimensions
7.46,79.5 to 139.46,79.5 on Mechanical 16